# EAGLE board Buck_Converter_brd (EAGLE 9.6.2)
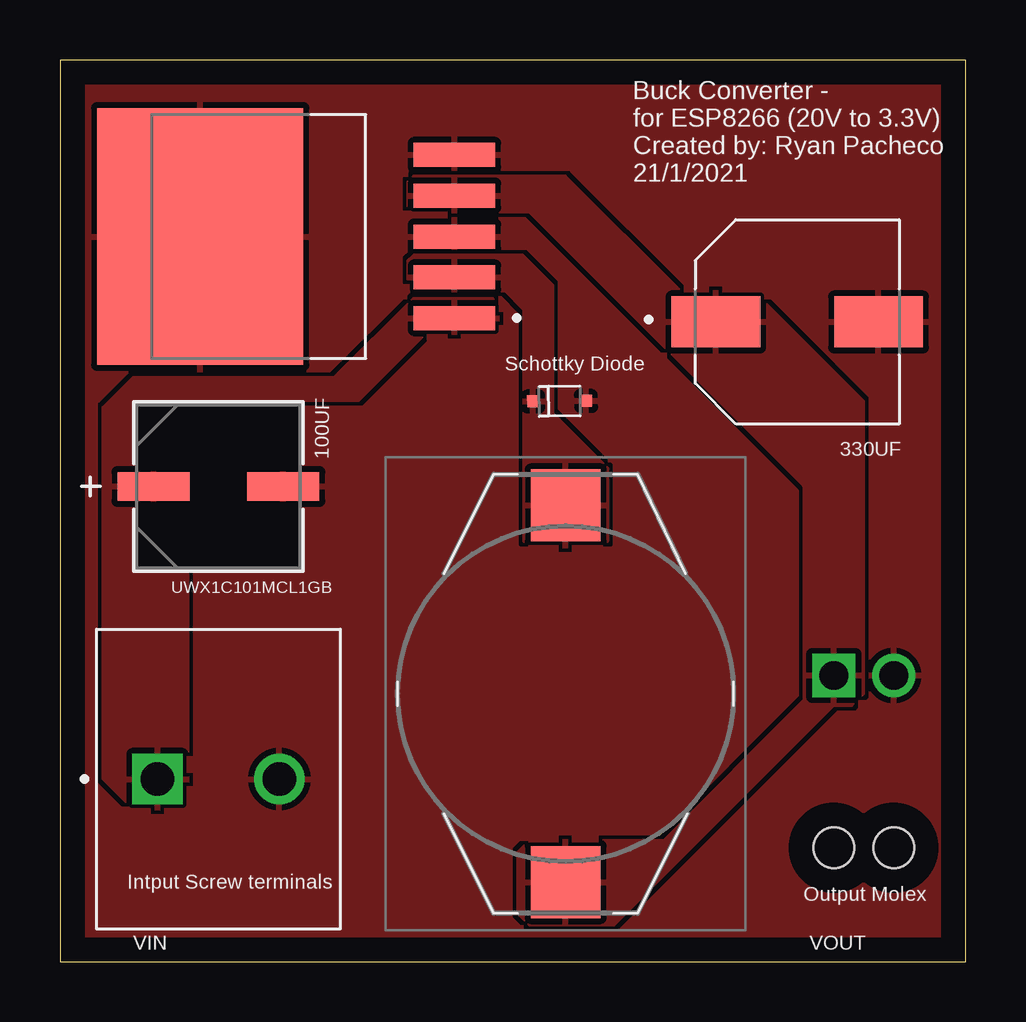
[diagram p0: board, top side]
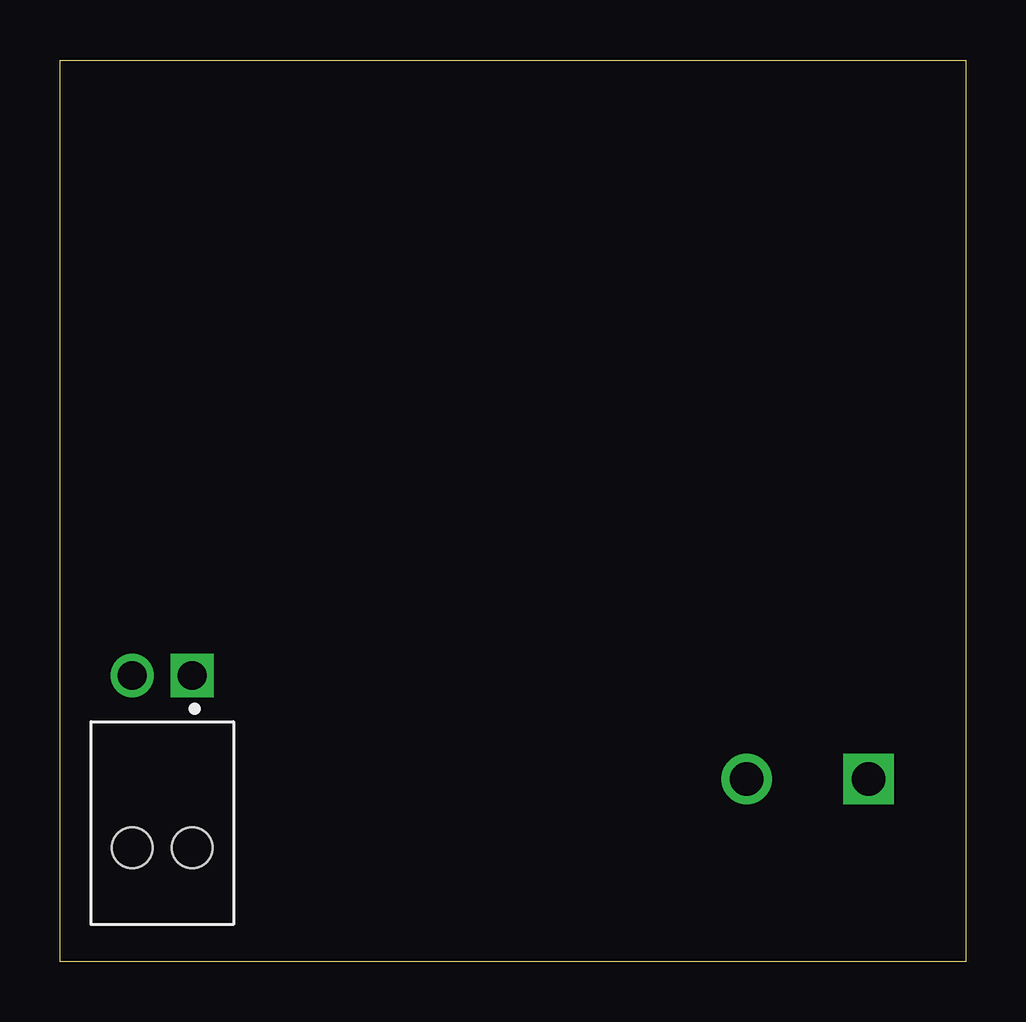
[diagram p1: board, bottom side, seen from below]

Size 37.77 x 37.58 mm. Coordinates in mm from the lower left corner, seen from the top.
Outline: 0,0 37.77,0 37.77,37.58 0,37.58 0,0
Copper layers (1*16): Top 0.035mm / dielectric 1.5mm / Bottom 0.035mm
Design rules "default": minimum track width 6mil, minimum drill 0.35mm, track to track 6mil, track to pad 6mil, pad to pad 6mil, via to via 6mil, smd to smd 6mil, copper to edge 40mil, drill to drill 6mil, minimum pad ring 10mil, minimum via ring 8mil, stop-mask expansion 4mil, vias tented up to drill 0mil, thermal gap 10mil

## Footprints (pad centres in the part's own frame; a part is rotated, then mirrored left to right if it is on the bottom)
PCAP_6.3X5.4-ELECT_NCA = smd 2.997 x 1.194: 1 -2.705,0; 2 2.705,0
SRR1806221M = smd 3 x 2.9: 1 -7.85,0; 2 7.85,0
CAPAE830X1080N = smd 3.69 x 2.12: 1 -3.39,0; 2 3.39,0
SOD323(F) = smd 0.5 x 0.5: 1 1.1,0; 2 -1.1,0
TE_282847-2 = drill 1.4 square: 1 0,0 | drill 1.4: 2 5.08,0
MOLEX_1053131202 = drill 1.2 square: 1 0,0 | drill 1.2: 2 -2.5,0 | hole 1.7: 0,-7.18; -2.5,-7.18
VREG_TPS79625KTTR = smd 3.4 x 1: 1 -10.6,3.4; 2 -10.6,1.7; 3 -10.6,0; 4 -10.6,-1.7; 5 -10.6,-3.4 | smd 8.6 x 10.7: 6 0,0

## Placement (x,y rotation side)
100UF  UWX1C101MCL1GB  [PCAP_6.3X5.4-ELECT_NCA]  6.6,19.81 0 top
100UH  SRR1806-221M  [SRR1806221M]  21.08,11.18 270 top
330UF  UWT1C331MNL1GS  [CAPAE830X1080N]  30.73,26.67 0 top
D1  BAT760,115  [SOD323(F)]  20.83,23.37 180.5 top
J1  282847-2  [TE_282847-2]  4.06,7.62 0 top
J3  1053131202  [MOLEX_1053131202]  32.26,11.94 0 bottom
U1  LM2576S-3.3/NOPB  [VREG_TPS79625KTTR]  5.84,30.23 180 top

## Library data of the parts
100UF = UWX1C101MCL1GB; BUILT_BY: EMA_UL_Team; MANUFACTURER_PART_NUMBER: UWX1C101MCL1GB; SOURCELIBRARY: Nichicon_2011-10-21; VENDOR: Nichicon
100UH = SamacSys_Parts; DESCRIPTION: Fixed Inductors 220uH 20% SMD 1806; HEIGHT: 6.8mm; MANUFACTURER_NAME: Bourns; MANUFACTURER_PART_NUMBER: SRR1806-221M; MOUSER_PART_NUMBER: 652-SRR1806-221M; MOUSER_PRICE-STOCK: https://www.mouser.co.uk/ProductDetail/Bourns/SRR1806-221M?qs=y9m3SKnhpLNwsaEdB1HCDQ%3D%3D
330UF = UWT1C331MNL1GS; DESCRIPTION: 330µF 16V Aluminum Electrolytic Capacitors Radial, Can - SMD 1000 Hrs @ 105°C; DIGI-KEY_PART_NUMBER: 493-2180-1-ND; MF: Nichicon; MP: UWT1C331MNL1GS; PACKAGE: Radial Nichicon; PURCHASE-URL: https://pricing.snapeda.com/search/part/UWT1C331MNL1GS/?ref=eda
D1 = BAT760_115; AVAILABILITY: Good; DESCRIPTION: Diode Schottky 20V 1A (DC) Surface Mount SOD-323; MF: Nexperia USA; MP: BAT760,115; PACKAGE: SOD323-2 Nexperia USA Inc.; PRICE: None; PURCHASE-URL: https://pricing.snapeda.com/search/part/BAT760,115/?ref=eda
J1 = 282847-2; AVAILABILITY: Good; CENTERLINE_PITCH: 5.08 mm[.2 in]; COMMENT: 282847-2; DESCRIPTION: Conn Terminal Block 2 POS 5.08mm Solder ST Thru-Hole 17.5A/Contact; EU_ROHS_COMPLIANCE: Compliant with Exemptions; MF: TE Connectivity; MP: 282847-2; NUMBER_OF_POSITIONS: 2; PACKAGE: None; PRICE: None; PURCHASE-URL: https://pricing.snapeda.com/search/part/282847-2/?ref=eda
J3 = 1053131202; AVAILABILITY: Warning; DESCRIPTION: Connector Header Through Hole, Right Angle 2 position 0.098 (2.50mm); MF: Molex; MP: 1053131202; PACKAGE: None; PRICE: None; PURCHASE-URL: https://pricing.snapeda.com/search/part/1053131202/?ref=eda
U1 = LM2576S-3.3_NOPB; AVAILABILITY: Warning; DESCRIPTION: SIMPLE SWITCHER&reg; 40V, 3A Low Component Count Step-Down Regulator 5-DDPAK/TO-263 -40 to 125; MF: Texas Instruments; MP: LM2576S-3.3/NOPB; PACKAGE: TO-263-5 Texas Instruments; PRICE: None; PURCHASE-URL: https://pricing.snapeda.com/search/part/LM2576S-3.3/NOPB/?ref=eda

## Nets
GND: 100UF.2 330UF.2 D1.2 J1.2 J3.2 U1.3 U1.5 U1.6
N$4: 100UH.1 D1.1 U1.2
VIN: 100UF.1 J1.1 U1.1
VOUT: 100UH.2 330UF.1 J3.1 U1.4

## Tracks (layer width: path | path; a pad name or v marks a point on that pad's centre or on a via)
GND
  pour Top (rank 6): 0,37.59 37.85,37.59 37.85,0 0,0
N$4
  pour Top: 19.3,29.46 14.73,29.46 14.48,29.21 14.48,28.45 14.99,27.94 18.54,27.94 19.3,27.18 19.3,17.53 19.56,17.27 22.61,17.27 22.86,17.53 22.86,20.57 20.57,22.86 20.57,28.19
VIN
  pour Top: 14.73,27.69 18.03,27.69 18.29,27.43 18.29,26.67 17.78,26.16 15.24,26.16 12.45,23.37 6.6,23.37 5.33,22.1 5.33,6.86 4.83,6.35 3.05,6.35 1.78,7.62 1.78,23.11 3.05,24.38 11.43,24.38
VOUT
  pour Top: 21.08,32.77 14.73,32.77 14.48,32.51 14.48,31.5 14.73,31.24 19.56,31.24 30.99,19.81 30.99,10.92 25.15,5.08 19.56,5.08 19.05,4.57 19.05,2.03 19.56,1.52 23.11,1.52 32.26,10.67 33.02,10.67 33.53,11.18 33.53,23.37 28.96,27.94 25.91,27.94

## Text on the board
tNames: Buck Converter - / for ESP8266 (20V to 3.3V) / Created by: Ryan Pacheco / 21/1/2021 | Schottky Diode | Intput Screw terminals | Output Molex | VIN | VOUT
tValues: 220uH